# Altium PCB S28A模块化小车底板_（无走线）.pcbdoc
Units mm, origin at the board's own origin, x right, y up, seen from the top; angles counter-clockwise.
Board outline 141.72 x 110.55 mm, 2 copper layers (Top Layer, Bottom Layer); 38 components, 47 nets, 158 pads, 0 vias.
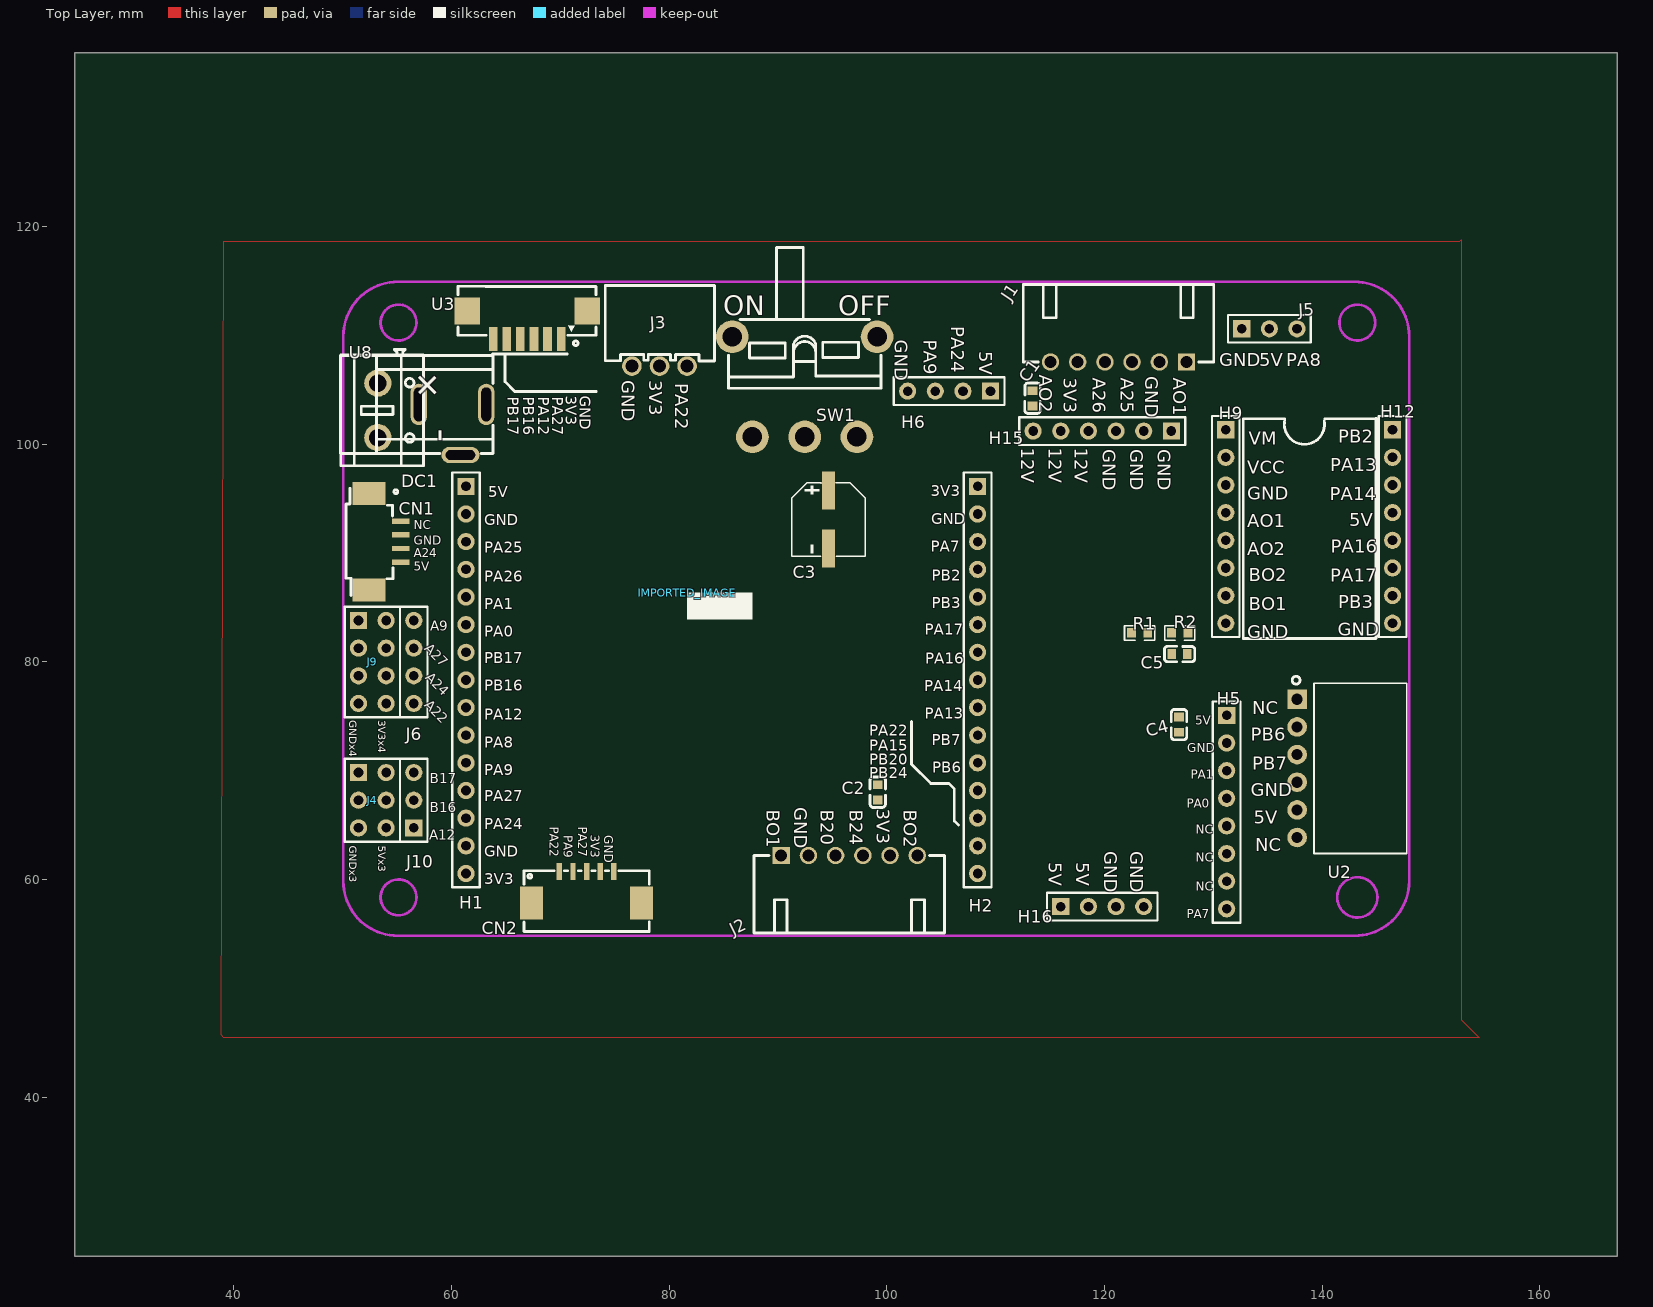
[diagram p0: Top Layer view]
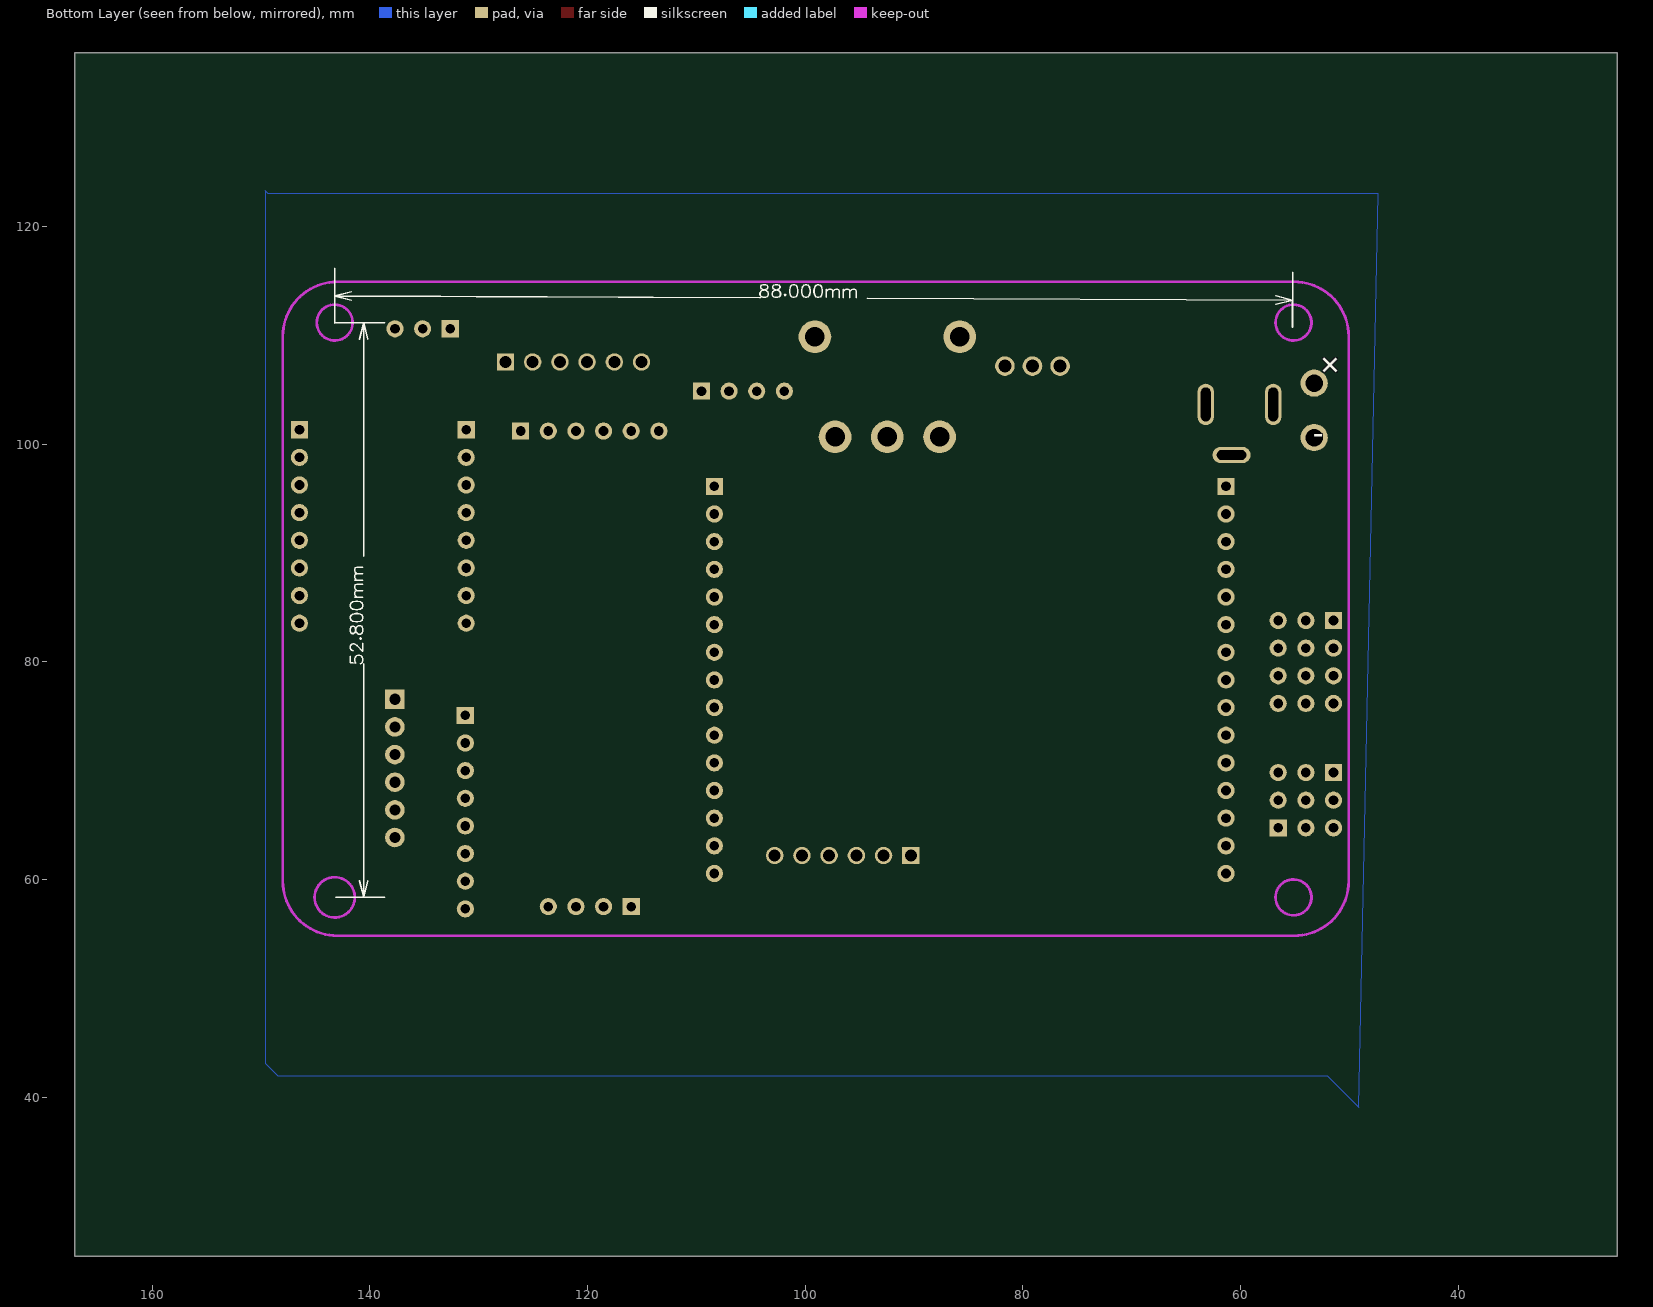
[diagram p1: Bottom Layer view, seen from below]

## Layer stack, top to bottom
Top Layer: signal copper (thickness not stored)
Dielectric: dielectric 0.32, FR-4, Dk 4.8
Bottom Layer: signal copper (thickness not stored)

## Board outline
167.117,25.4 25.4,25.4 25.4,135.955 167.117,135.955

## Components (designator, comment, footprint, x,y, rotation, side; value= is the part's Value field where it differs from the comment)
C1 "0.1u" C0603 113.396,104.205 r270 top
C2 "0.1u" C0603 99.172,68.01 r270 top
C3 "220uF" CAP-SMD_BD6.3-L6.6-W6.6-LS7.4-FD 94.654,93.064 r270 top
C4 "0.1u" C0603 126.858,74.233 r90 top
C5 "0.1u" C0603 126.896,80.71 r180 top
CN1 "1.25-4P WT" CONN-SMD_1.25-4PWT 53.887,91.032 r90 top
CN2 "1.25-5P WT" CONN-SMD_1.25-5PWT 72.429,59.282 r180 top
DC1 "DC-005A-20A" DC-IN-TH_DC-005A-20A 60.11,101.319 r90 top
H1 "HDR-F-2.54_1x15" HDR-F-2.54_1X15 61.35,78.332 r270 top
H2 "C8T6" HDR-F-2.54_1X15 108.35,78.332 r270 top
H5 "MPU6050" HDR-F-2.54_1X8 131.23,67.458 r270 top
H6 "超声波" HDR-F-2.54_1X4 105.73,104.858 r180 top
H9 "HDR-F-2.54_1x8" HDR-F-2.54_1X8 131.15,93.699 r270 top
H12 "HDR-F-2.54_1x8" HDR-F-2.54_1X8 146.47,93.699 r270 top
H15 "12TO5" HDR-F-2.54_1X6 121.07,101.192 r180 top
H16 "12TO5" HDR-F-2.54_1X4 119.8,57.504 r0 top
IMPORTED_IMAGE "IMPORTED_IMAGE" IMPORTED_IMAGE 81.669,86.32 r0 top
J1 "X8821WR-06S-N0SN" CONN-TH_6P-P2.50_X8821WR-06S-N2SN 121.292,107.542 r180 top
J2 "X8821WR-06S-N0SN" CONN-TH_6P-P2.50_X8821WR-06S-N2SN 96.559,62.203 r0 top
J3 "XH-3AW_C2908612" CONN-TH_3P-P2.54_HCTL_XH-3AW 79.128,107.161 r0 top
J4 "HDR-M-2.54_2x3" HDR-M-2.54_2X3 51.474,69.823 r270 top
J5 "舵机接口" HDR-M-2.54_1X3 135.151,110.59 r0 top
J6 "HDR-M-2.54_1x4" HDR-M-2.54_1X4 56.554,79.983 r90 top
J9 "HDR-M-2.54_2x4" HDR-M-2.54_2X4 52.744,79.983 r270 top
J10 "HDR-M-2.54_1x3" HDR-M-2.54_1X3 56.554,67.283 r90 top
R1 "10k" R0603 123.229,82.65 r0 top
R2 "1k" R0603 126.912,82.65 r0 top
SW1 "SS-12D11G5" SW-TH_SS-12D11G5 92.463,105.256 r180 top
U2 "DW254W-11-06-85" CONN-TH_6P-P2.54_DEALON_DW254W-11-06-85 137.707,70.204 r270 top
U3 "HC-1.25-6PWT" CONN-SMD_6P-P1.25_HC-1.25-6PWT 66.968,110.936 r180 top
U8 "DB301V-5.0-2P-BU-P" CONN-TH_2P-P5.00_DB301V-5.0-2P-BU-P 53.252,103.097 r90 top
? "" ? 99.229,113.441 r0 top
? "" ? 140.87,84.758 r0 top
? "" ? 86.463,51.123 r0 top
? "" ? 83.034,49.415 r0 top
? "" ? 143.912,84.364 r0 top
? "" ? 44.939,72.617 r0 top
? "" ? 137.39,52.358 r0 top

## Footprints (in the part's own frame and the unit in brackets; to place one, negate y for a bottom-side part, rotate by r counter-clockwise, add the part's x,y. Pads: shape width x height; smd on the part's side, far side on the other; paste and mask are expansions set on the pad)
C0603 [mm]
  rect 0.8x0.9 smd paste+0 mask+0.051: 1(-0.7,0) 2(0.7,0)
  silkscreen extent -1.41,-0.71 1.39,0.72
CAP-SMD_BD6.3-L6.6-W6.6-LS7.4-FD [mm]
  rect 3.5x1.2 smd paste+0 mask+0.051: 1(-2.67,0) 2(2.67,0)
  silkscreen extent -3.38,-3.38 3.38,3.38
CONN-SMD_1.25-4PWT [mm]
  rect 0.5x1.6 smd paste+0 mask+0.051: 1(1.875,-1.45) 2(0.625,-1.45) 3(-0.625,-1.45) 4(-1.875,-1.45)
  rect 2.1x3 smd paste+0 mask+0.051: 5(4.425,1.45) 6(-4.425,1.45)
  silkscreen extent -4.95,-1.2 4.9,3.55
CONN-SMD_1.25-5PWT [mm]
  rect 0.5x1.6 smd paste+0 mask+0.051: 1(2.5,-1.45) 2(1.25,-1.45) 3(0,-1.45) 4(-1.25,-1.45) 5(-2.5,-1.45)
  rect 2.1x3 smd paste+0 mask+0.051: 6(5.05,1.45) 7(-5.05,1.45)
  silkscreen extent -5.75,-1.52 5.75,4.05
CONN-SMD_6P-P1.25_HC-1.25-6PWT [mm]
  rect 0.8x2.2 smd paste+0 mask+0.05: 1(-3.125,1.3) 2(-1.875,1.3) 3(-0.625,1.3) 4(0.625,1.3) 5(1.875,1.3) 6(3.125,1.3)
  rect 2.35x2.5 smd paste+0 mask+0.05: 7(-5.505,-1.3) 8(5.505,-1.3)
  silkscreen extent -6.33,-3.56 6.35,1.88
CONN-TH_2P-P5.00_DB301V-5.0-2P-BU-P [mm]
  round 2.5 hole 1.6 paste+0 mask+0.051: 1(-2.5,0) 2(2.5,0)
  silkscreen extent -5.08,-4.2 5.59,3.4
CONN-TH_3P-P2.54_HCTL_XH-3AW [mm]
  round 1.8 hole 1.199 paste+0 mask+0.051: 1(-2.54,0) 2(0.001,0) 3(2.54,0)
  silkscreen extent -4.98,0.46 5.04,7.4
CONN-TH_6P-P2.50_X8821WR-06S-N2SN [mm]
  rect 1.6x1.6 hole 1.1 paste+0 mask+0.051: 1(-6.25,0)
  round 1.6 hole 1.1 paste+0 mask+0.051: 2(-3.75,0) 3(-1.25,0) 4(1.25,0) 5(3.75,0) 6(6.25,0)
  silkscreen extent -8.75,-7.11 8.75,0
CONN-TH_6P-P2.54_DEALON_DW254W-11-06-85 [mm]
  rect 1.8x1.8 hole 1.02 paste+0 mask+0.05: 1(-6.35,0)
  round 1.8 hole 1.02 paste+0 mask+0.05: 2(-3.81,0) 3(-1.27,0) 4(1.27,0) 5(3.81,0) 6(6.35,0)
  silkscreen extent -8.46,-0.46 7.82,10.05
DC-IN-TH_DC-005A-20A [mm]
  oval 3.8x1.5 hole 0.9 slot 3.1 at 0 deg paste+0 mask+0.051: 1(2.325,-3.1) 2(2.325,3.1)
  oval 1.5x3.5 hole 0.9 slot 2.7 at 90 deg paste+0 mask+0.051: 3(-2.325,-0.722)
  silkscreen extent -2.17,-3.72 6.83,10.28
HDR-F-2.54_1X4 [mil]
  rect 62x62 hole 35 paste+0 mask+2: 1(-150,0)
  round 62 hole 35 paste+0 mask+2: 2(-50,0) 3(50,0) 4(150,0)
  silkscreen extent -200,-50 200,50
HDR-F-2.54_1X6 [mil]
  rect 62x62 hole 35 paste+0 mask+2: 1(-200,0)
  round 62 hole 35 paste+0 mask+2: 2(-100,0) 3(0,0) 4(100,0) 5(200,0) 6(300,0)
  silkscreen extent -250,-50 350,50
HDR-F-2.54_1X8 [mil]
  rect 62x62 hole 35 paste+0 mask+2: 1(-300,0)
  round 62 hole 35 paste+0 mask+2: 2(-200,0) 3(-100,0) 4(0,0) 5(100,0) 6(200,0) 7(300,0) 8(400,0)
  silkscreen extent -350,-50 450,50
HDR-F-2.54_1X15 [mil]
  rect 62x62 hole 35 paste+0 mask+2: 1(-700,0)
  round 62 hole 35 paste+0 mask+2: 2(-600,0) 3(-500,0) 4(-400,0) 5(-300,0) 6(-200,0) 7(-100,0) 8(0,0) 9(100,0) 10(200,0) 11(300,0) 12(400,0) 13(500,0) 14(600,0) 15(700,0)
  silkscreen extent -750,-50 750,50
HDR-M-2.54_1X3 [mil]
  rect 62x62 hole 35 paste+0 mask+2: 1(-100,0)
  round 62 hole 35 paste+0 mask+2: 2(0,0) 3(100,0)
  silkscreen extent -150,-50 150,50
HDR-M-2.54_1X4 [mil]
  round 62 hole 35 paste+0 mask+2: 1(-150,0) 2(-50,0) 3(50,0) 4(150,0)
  silkscreen extent -200,-50 200,50
HDR-M-2.54_2X3 [mil]
  rect 62x62 hole 35 paste+0 mask+2: 1(0,0)
  round 62 hole 35 paste+0 mask+2: 2(0,100) 3(100,0) 4(100,100) 5(200,0) 6(200,100)
  silkscreen extent -50,-50 250,150
HDR-M-2.54_2X4 [mil]
  rect 62x62 hole 35 paste+0 mask+2: 1(-150,-50)
  round 62 hole 35 paste+0 mask+2: 2(-150,50) 3(-50,-50) 4(-50,50) 5(50,-50) 6(50,50) 7(150,-50) 8(150,50)
  silkscreen extent -200,-100 200,100
IMPORTED_IMAGE [mm]
  silkscreen extent 0,-2.4 6,0
R0603 [mm]
  rect 0.806x0.864 smd paste-100 mask+0.051: 1(-0.753,0) 2(0.753,0)
  silkscreen extent -1.39,-0.66 1.39,0.66
SW-TH_SS-12D11G5 [mm]
  round 3 hole 1.8 paste+0 mask+0.051: 1(4.8,4.6) 2(0,4.6) 3(-4.8,4.6) 4(-6.65,-4.6) 5(6.65,-4.6)
  silkscreen extent -7,-12.81 7,0.13
? [mm]

## Nets (pads, with @x,y where several pads share a name; then routed paths per layer and width w, separated by ;. In a path a pad name is that pad's centre, name@x,y a point inside that pad or via, vN(x,y) a via of type N, cw(c..) or ccw(c..) an arc to the next point about the centre after c; other vN are vias at no path point)
3V3: C1.2 C2.2 CN2.4 H1.15 H2.1 J1.5 J2.5 J3.2 J9.2 J9.4 J9.6 J9.8 U3.2
5V: C4.2 CN1.4 CN2.6 CN2.7 H1.1 H5.1 H6.1 H9.2 H12.4 H16.1 H16.2 J4.2 J4.4 J4.6 J5.2 U2.5
12V: C3.1 H9.1 H15.4 H15.5 H15.6 R1.1 SW1.2
AO1: H9.4 J1.1
AO2: H9.5 J1.6
BO1: H9.7 J2.1
BO2: H9.6 J2.6
GND: C1.1 C2.1 C3.2 C4.1 C5.1 CN1.2 CN1.5 CN1.6 CN2.5 DC1.2 DC1.3 H1.2 H1.14 H2.2 H5.2 H6.4 H9.3 H9.8 H12.8 H15.1 H15.2 H15.3 H16.3 H16.4 J1.2 J2.2 J3.1 J4.1 J4.3 J4.5 J5.1 J9.1 J9.3 J9.5 J9.7 R2.2 U2.4 U3.1 U3.7 U3.8 U8.1
PA0: H1.10 J5.3
PA1: CN2.2 H1.11 H6.3 J6.4
PA2: CN2.3 H1.12 J6.3 U3.6
PA3: CN1.3 H1.13 H6.2 J6.2
PA6: H2.15 J2.4
PA7: H2.14 J2.3
PA8: H2.5 H12.7
PA11: H2.4 H12.1
PA12: H2.3 H5.8
PB0: C5.2 H2.13 R1.2 R2.1
PB1: CN2.1 H2.12 J3.3 J6.1
PB6: H1.3 J1.3
PB7: H1.4 J1.4
PB8: H1.5 H5.3
PB9: H1.6 H5.4
PB10: H2.11 U2.2
PB11: H2.10 U2.3
PB12: H2.9 H12.3
PB13: H2.8 H12.2
PB14: H2.7 H12.5
PB15: H2.6 H12.6
PC13: H1.7 J10.3 U3.3
PC14: H1.8 J10.2 U3.4
PC15: H1.9 J10.1 U3.5
S$14509: 
S$14513: 
S$112028: 
S$113267: 
S$157343: 
S$165578: 
S$166494: 
S$217770: 
S$217807: 
S$226904: 
S$227004: 
S$232476: 
S$1655789: 
S$1664941: 
VIN_SW: DC1.1 SW1.1 U8.2
pads on no net: CN1.1 H5.5 H5.6 H5.7 SW1.3 SW1.4 SW1.5 U2.1 U2.6

## Polygon pours and split planes (outlines as drawn)
GND on Bottom Layer (solid): 47.356,123.001 149.337,123.001 149.591,123.255 149.591,43.118 148.448,41.975 52.055,41.975 49.134,39.054
GND on Top Layer (solid): 39.101,118.619 152.639,118.619 152.766,118.746 152.766,47.118 154.417,45.467 39.101,45.467 38.847,45.721

## Keep-outs
Keep-Out Layer:
  circle w0.254: c55.15,111.158 r1.65
  circle w0.254 net S$217770: c55.15,58.358 r1.65
  circle w0.254: c143.23,58.358 r1.85
  circle w0.254 net S$217807: c143.23,111.158 r1.65
  lines w0.254: 50.077,59.832 ccw(c55.077,59.832) 55.077,54.832 ; 50.077,109.908 cw(c55.077,109.908) 55.077,114.908 ; 142.994,54.832 ccw(c142.994,59.832) 147.994,59.832 ; 142.994,114.908 cw(c142.994,109.908) 147.994,109.908

## Other copper
Top Layer:
  pour cut-out net S$227004: 140.104,58.485 cw(c143.231,58.485) 146.358,58.485 cw(c143.231,58.485) 140.104,58.485
  pour cut-out net S$226904: 140.152,111.19 cw(c143.279,111.19) 146.406,111.19 cw(c143.279,111.19) 140.152,111.19
  pour cut-out net S$165578: 51.966,111.063 cw(c55.093,111.063) 58.22,111.063 cw(c55.093,111.063) 51.966,111.063
  pour cut-out net S$166494: 52.014,58.358 cw(c55.141,58.358) 58.268,58.358 cw(c55.141,58.358) 52.014,58.358
Bottom Layer:
  pour cut-out net S$227004: 140.104,58.485 cw(c143.231,58.485) 146.358,58.485 cw(c143.231,58.485) 140.104,58.485
  pour cut-out net S$226904: 140.152,111.19 cw(c143.279,111.19) 146.406,111.19 cw(c143.279,111.19) 140.152,111.19
  pour cut-out net S$1655789: 52.004,111.066 cw(c55.141,111.066) 58.278,111.066 cw(c55.141,111.066) 52.004,111.066
  pour cut-out net S$1664941: 52.014,58.358 cw(c55.141,58.358) 58.268,58.358 cw(c55.141,58.358) 52.014,58.358

## Silkscreen, mask and mechanical layers (free items; w line width, h text height)
Top Overlay:
  lines w0.254 net PA6: 102.274,70.585 104.052,68.807 105.703,68.807 106.211,68.299 106.211,65.378 106.592,64.997
  lines w0.254 net S$112028: 64.936,105.729 64.936,108.177
  lines w0.254 net S$113267: 63.793,108.269 70.651,108.269
  lines w0.254 net S$14509: 132.754,102.335 136.554,102.335 ; 136.564,102.208 ccw(c138.369,101.821) 140.188,102.138 ; 140.247,102.335 144.921,102.335
  lines w0.254 net S$14513: 132.754,82.132 132.754,102.335 ; 132.754,82.269 132.754,82.142 144.946,82.142 144.946,102.375
  lines w0.254 net S$157343: 102.274,70.585 102.274,74.522
  lines w0.254 net S$232476: 64.936,105.729 65.825,104.84 73.318,104.84
  text "ON" at 85.002,111.814 h1.8
  text "OFF" at 95.543,111.814 h1.8
  text "PA24" at 105.938,110.809 h1.2 r270
  text "GND" at 100.731,109.577 h1.2 r270
  text "PA9" at 103.398,109.577 h1.2 r270
  text "5V" at 108.478,108.508 h1.2 r270
  text "GND" at 130.541,107.161 h1.2
  text "5V" at 134.224,107.161 h1.2
  text "PA8" at 136.691,107.161 h1.2
  text "AO2" at 113.993,106.364 h1.2 r270
  text "GND" at 123.772,106.237 h1.2 r270
  text "3V3" at 116.279,106.11 h1.2 r270
  text "A26" at 118.946,106.11 h1.2 r270
  text "A25" at 121.486,106.11 h1.2 r270
  text "AO1" at 126.312,106.11 h1.2 r270
  text "GND" at 75.639,105.856 h1.2 r270
  text "3V3" at 78.179,105.856 h1.2 r270
  text "PA22" at 80.592,105.602 h1.2 r270
  text "+" at 59.597,105.124 h2.5 r135
  text "3V3" at 70.532,104.459 h1 r270
  text "GND" at 71.802,104.459 h1 r270
  text "PB17" at 65.198,104.332 h1 r270
  text "PB16" at 66.595,104.332 h1 r270
  text "PA12" at 67.992,104.332 h1 r270
  text "PA27" at 69.262,104.332 h1 r270
  text "-" at 59.963,100.176 h2.5 r90
  text "PB2" at 141.499,100.141 h1.2
  text "VM" at 133.262,99.957 h1.2
  text "12V" at 112.342,99.668 h1.2 r270
  text "12V" at 114.882,99.668 h1.2 r270
  text "12V" at 117.295,99.668 h1.2 r270
  text "GND" at 119.835,99.541 h1.2 r270
  text "GND" at 122.375,99.541 h1.2 r270
  text "GND" at 124.915,99.541 h1.2 r270
  text "PA13" at 140.757,97.509 h1.2
  text "VCC" at 133.135,97.29 h1.2
  text "3V3" at 104.034,95.196 h1
  text "5V" at 63.412,95.104 h1
  text "GND" at 133.135,94.877 h1.2
  text "PA14" at 140.701,94.842 h1.2
  text "GND" at 104.079,92.656 h1
  text "GND" at 63.031,92.564 h1
  text "5V" at 142.512,92.429 h1.2
  text "AO1" at 133.135,92.337 h1.2
  text "NC" at 56.554,92.156 h0.8
  text "GND" at 56.554,90.759 h0.8
  text "PA7" at 104.034,90.116 h1
  text "PA25" at 63.031,90.024 h1
  text "PA16" at 140.81,90.016 h1.2
  text "AO2" at 133.135,89.797 h1.2
  text "A24" at 56.554,89.616 h0.8
  text "5V" at 56.554,88.346 h0.8
  text "PB2" at 104.125,87.449 h1
  text "BO2" at 133.262,87.384 h1.2
  text "PA26" at 63.031,87.357 h1
  text "PA17" at 140.757,87.349 h1.2
  text "PB3" at 141.499,84.936 h1.2
  text "PB3" at 104.125,84.909 h1
  text "PA1" at 63.031,84.817 h1
  text "BO1" at 133.262,84.717 h1.2
  text "A9" at 58.078,82.835 h0.9
  text "PA17" at 103.508,82.496 h1
  text "GND" at 141.443,82.396 h1.2
  text "PA0" at 63.031,82.277 h1
  text "GND" at 133.135,82.177 h1.2
  text "A27" at 57.452,81.154 h0.9 r315
  text "PB17" at 63.031,79.864 h1
  text "PA16" at 103.553,79.829 h1
  text "A24" at 57.579,78.487 h0.9 r315
  text "PB16" at 63.031,77.324 h1
  text "PA14" at 103.462,77.289 h1
  text "A22" at 57.452,75.947 h0.9 r315
  text "NC" at 133.589,75.157 h1.2
  text "PA13" at 103.508,74.749 h1
  text "GNDx4" at 50.616,74.649 h0.7 r270
  text "3V3x4" at 53.283,74.649 h0.7 r270
  text "PA12" at 63.031,74.657 h1
  text "5V" at 128.333,74.214 h0.8
  text "PA22" at 98.41,73.225 h1
  text "PB6" at 133.462,72.744 h1.2
  text "PB7" at 104.125,72.336 h1
  text "PA8" at 63.031,72.117 h1
  text "PA15" at 98.41,71.828 h1
  text "GND" at 127.62,71.674 h0.8
  text "PB20" at 98.41,70.558 h1
  text "PB7" at 133.589,70.077 h1.2
  text "PB6" at 104.171,69.796 h1
  text "PA9" at 63.031,69.577 h1
  text "PB24" at 98.41,69.288 h1
  text "PA1" at 127.911,69.261 h0.8
  text "B17" at 58.024,68.83 h0.9
  text "GND" at 133.462,67.664 h1.2
  text "PA27" at 63.031,67.164 h1
  text "GND" at 91.514,66.648 h1.2 r270
  text "PA0" at 127.584,66.594 h0.8
  text "3V3" at 99.08,66.486 h1.2 r270
  text "BO1" at 88.974,66.394 h1.2 r270
  text "B20" at 93.927,66.394 h1.2 r270
  text "B24" at 96.594,66.394 h1.2 r270
  text "BO2" at 101.547,66.394 h1.2 r270
  text "B16" at 58.024,66.163 h0.9
  text "5V" at 133.716,65.124 h1.2
  text "PA22" at 69.054,64.859 h0.8 r270
  text "PA27" at 71.648,64.859 h0.8 r270
  text "PA24" at 63.031,64.624 h1
  text "NC" at 128.369,64.181 h0.8
  text "3V3" at 72.791,64.11 h0.8 r270
  text "PA9" at 70.324,64.073 h0.8 r270
  text "GND" at 74.061,64.075 h0.8 r270
  text "A12" at 57.951,63.658 h0.9
  text "GNDx3" at 50.616,63.092 h0.7 r270
  text "5Vx3" at 53.283,63.092 h0.7 r270
  text "GND" at 119.962,62.584 h1.2 r270
  text "GND" at 122.375,62.584 h1.2 r270
  text "NC" at 133.843,62.584 h1.2
  text "GND" at 63.031,62.084 h1
  text "NC" at 128.369,61.641 h0.8
  text "5V" at 114.882,61.568 h1.2 r270
  text "5V" at 117.422,61.568 h1.2 r270
  text "3V3" at 63.031,59.544 h1
  text "NC" at 128.369,58.974 h0.8
  text "PA7" at 127.584,56.434 h0.8
Bottom Overlay:
  text "+" at 53.197,107.47 h2 r45
  text "-" at 52.363,101.557 h2 r180